# Altium PCB WaferPCB.PcbDoc (part 1 of 2)
Units mm, origin at the board's own origin, x right, y up, seen from the top; angles counter-clockwise.
Board outline 440 x 440 mm, 2 copper layers (Top Layer, Bottom Layer); 4 components, 400 nets, 800 pads, 0 vias.
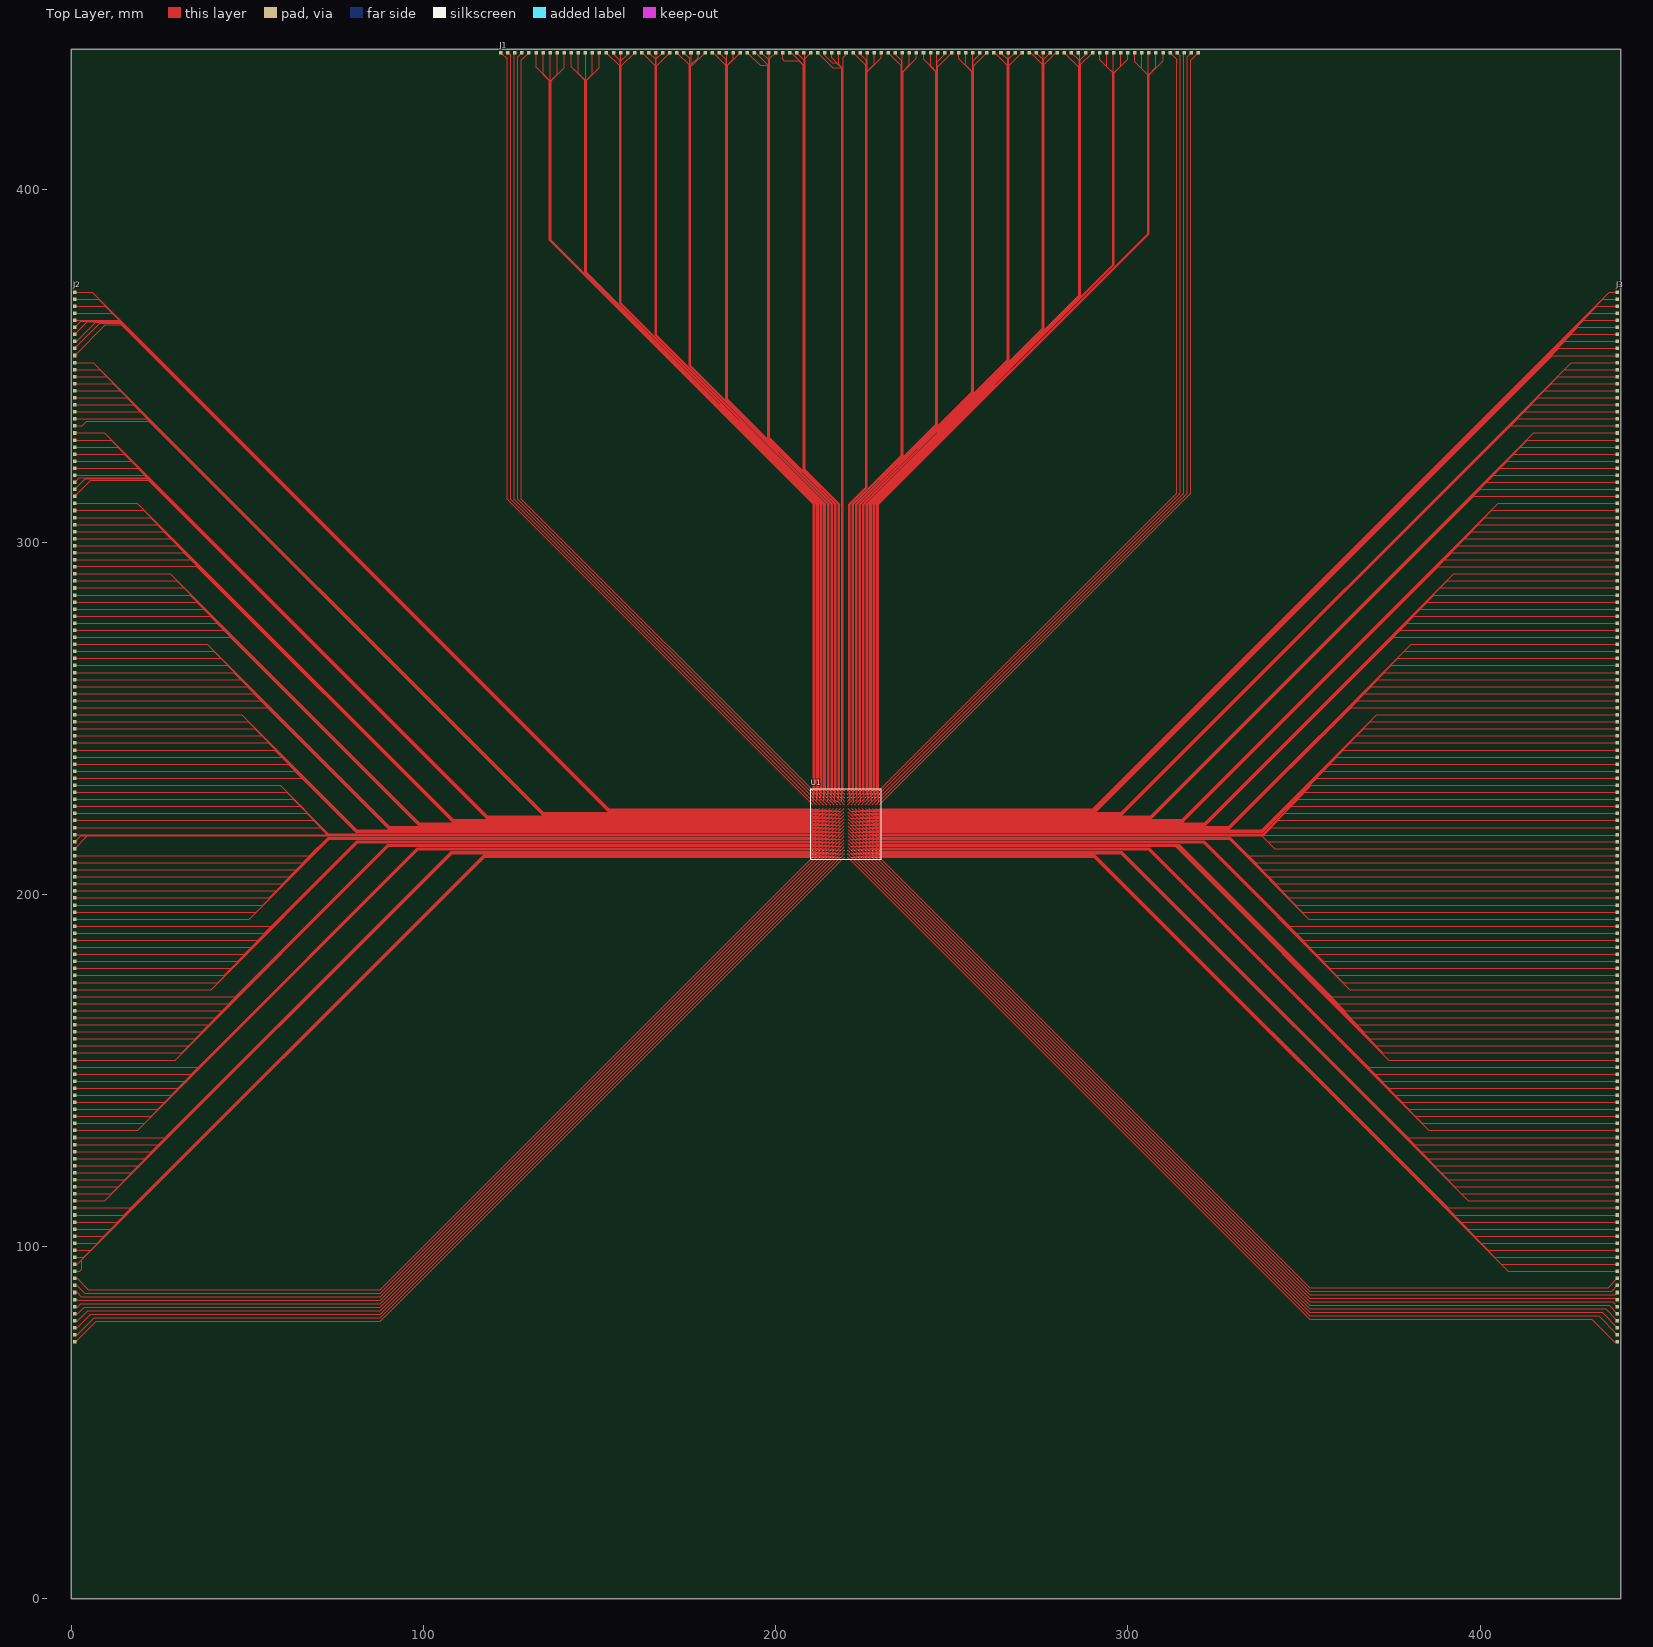
[diagram p0: Top Layer view]
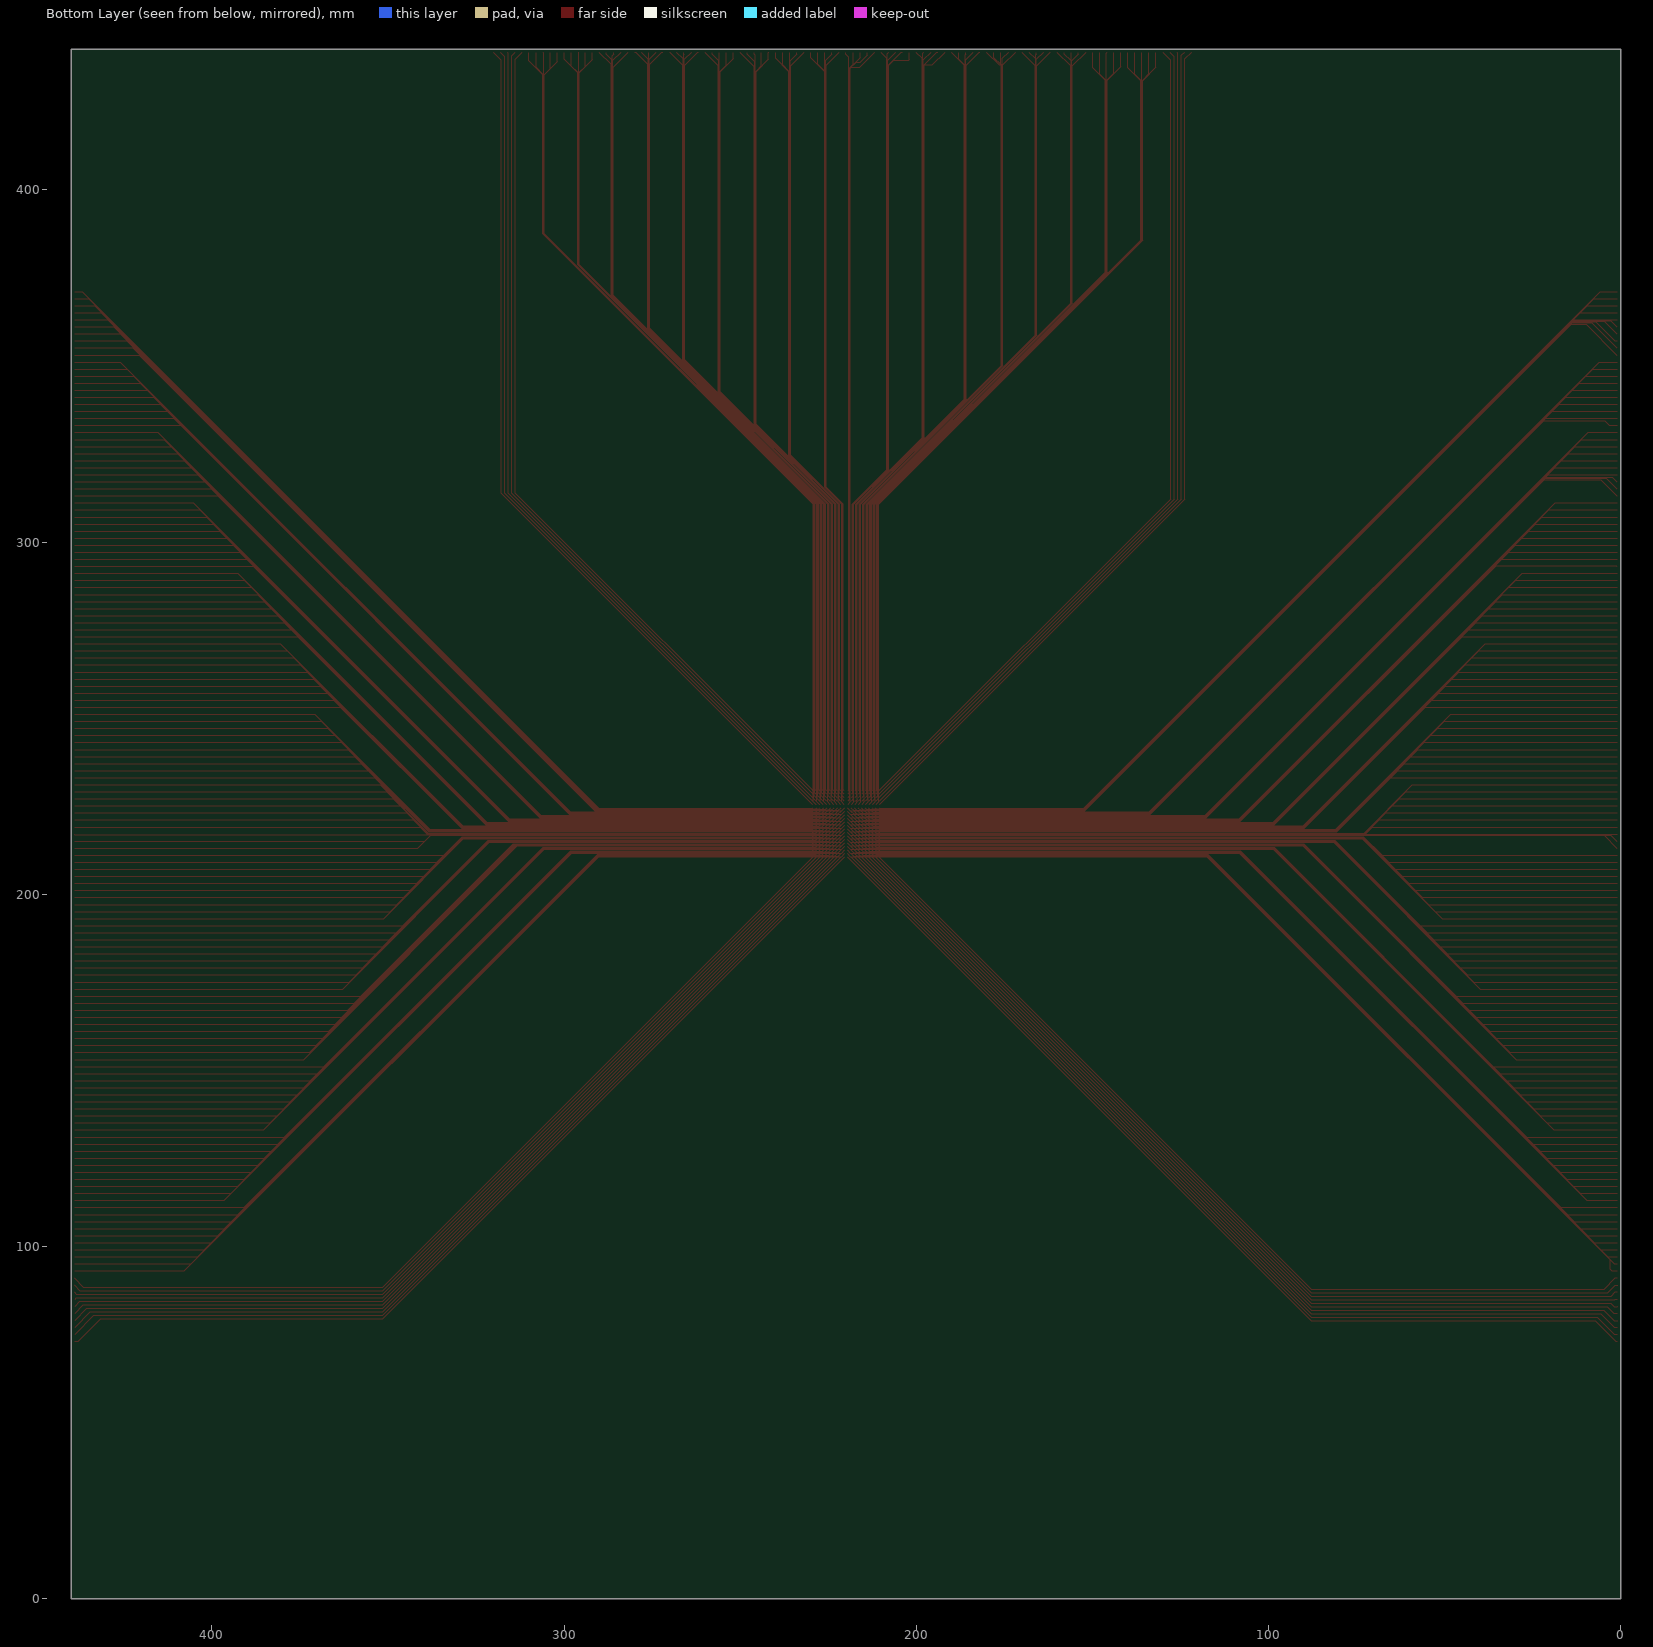
[diagram p1: Bottom Layer view, seen from below]

## Layer stack, top to bottom
Top Solder: solder mask 0.0102, Solder Resist, Dk 3.5
Top Layer: signal copper 0.0356
Dielectric 1: dielectric 0.32, FR-4, Dk 4.8
Bottom Layer: signal copper 0.0356
Bottom Solder: solder mask 0.0102, Solder Resist, Dk 3.5

## Board outline
0,0 440,0 440,440 0,440

## Design rules (kind name [scope] priority, off if disabled: settings)
Clearance [All] p1: gap=0.254 ignorepadtopadclearanceinfootprint=FALSE except(0: Arc-Hole Track-Hole SMDPad-Hole THPad-Hole Via-Hole Fill-Hole Poly-Hole Region-Hole Text-Hole; 0.04: Arc-Arc Arc-Track Arc-SMDPad Arc-THPad Arc-Via Track-Track Track-SMDPad Track-THPad Track-Via SMDPad-SMDPad SMDPad-THPad SMDPad-Via THPad-THPad THPad-Via Via-Via)
ComponentClearance [All] p1: gap=0.05 collisioncheckmode=3 verticalgap=0.254 showdistances=FALSE
DiffPairsRouting [All] p1: maxlimit=0.2 minlimit=0.04 mostfreqgap=0.04 toplayer_minwidth=0.2 toplayer_maxwidth=0.2 toplayer_prefwidth=0.2 bottomlayer_minwidth=0.2 bottomlayer_maxwidth=0.2 bottomlayer_prefwidth=0.2 maxuncoupledlength=12.7
PolygonConnect [All] p1: connectstyle=Relief reliefconductorwidth=0.254 reliefentries=4 polygonreliefangle="90 Angle" airgapwidth=0.254
RoutingLayers [All] p1: top layer_v5=TRUE bottom layer_v5=FALSE
RoutingVias [All] p1: holewidth=0.711 width=1.27 viastyle="Through Hole" minholewidth=0.711 minwidth=1.27 maxholewidth=0.711 maxwidth=1.27
SolderMaskExpansion [All] p1: expansion=0.102 istentingtop=FALSE
Width [All] p1: maxlimit=0.03 minlimit=0.03 preferedwidth=0.03 minimp=50.000000 maximp=50.000000 favimp=50.000000
27 further rules are at their usual default settings.

## Classes and differential pairs
component class "Wafer Schematic": J1 J2 J3

## Components (designator, comment, footprint, x,y, rotation, side; value= is the part's Value field where it differs from the comment)
J1 "Bond Pads (100)" "BOND PADS (100)" 320,442.5 r90 top
J2 "Bond Pads (150)" "BOND PADS (150)" 2,70 r0 top
J3 "Bond Pads (150)" "BOND PADS (150)" 440,70 r0 top
U1 "Sensing Electrodes (400)" LGA400C100P20X20_2000X2000X0 220,220 r0 top

## Footprints (in the part's own frame and the unit in brackets; to place one, negate y for a bottom-side part, rotate by r counter-clockwise, add the part's x,y. Pads: shape width x height; smd on the part's side, far side on the other; paste and mask are expansions set on the pad)
"BOND PADS (100)" [mm]
  rect 1x1 smd: 1(-3.5,0) 2(-3.5,2) 3(-3.5,4) 4(-3.5,6) 5(-3.5,8) 6(-3.5,10) 7(-3.5,12) 8(-3.5,14) 9(-3.5,16) 10(-3.5,18) 11(-3.5,20) 12(-3.5,22) 13(-3.5,24) 14(-3.5,26) 15(-3.5,28) 16(-3.5,30) 17(-3.5,32) 18(-3.5,34) 19(-3.5,36) 20(-3.5,38) 21(-3.5,40) 22(-3.5,42) 23(-3.5,44) 24(-3.5,46) 25(-3.5,48) 26(-3.5,50) 27(-3.5,52) 28(-3.5,54) 29(-3.5,56) 30(-3.5,58) 31(-3.5,60) 32(-3.5,62) 33(-3.5,64) 34(-3.5,66) 35(-3.5,68) 36(-3.5,70) 37(-3.5,72) 38(-3.5,74) 39(-3.5,76) 40(-3.5,78) 41(-3.5,80) 42(-3.5,82) 43(-3.5,84) 44(-3.5,86) 45(-3.5,88) 46(-3.5,90) 47(-3.5,92) 48(-3.5,94) 49(-3.5,96) 50(-3.5,98) 51(-3.5,100) 52(-3.5,102) 53(-3.5,104) 54(-3.5,106) 55(-3.5,108) 56(-3.5,110) 57(-3.5,112) 58(-3.5,114) 59(-3.5,116) 60(-3.5,118) 61(-3.5,120) 62(-3.5,122) 63(-3.5,124) 64(-3.5,126) 65(-3.5,128) 66(-3.5,130) 67(-3.5,132) 68(-3.5,134) 69(-3.5,136) 70(-3.5,138) 71(-3.5,140) 72(-3.5,142) 73(-3.5,144) 74(-3.5,146) 75(-3.5,148) 76(-3.5,150) 77(-3.5,152) 78(-3.5,154) 79(-3.5,156) 80(-3.5,158) 81(-3.5,160) 82(-3.5,162) 83(-3.5,164) 84(-3.5,166) 85(-3.5,168) 86(-3.5,170) 87(-3.5,172) 88(-3.5,174) 89(-3.5,176) 90(-3.5,178) 91(-3.5,180) 92(-3.5,182) 93(-3.5,184) 94(-3.5,186) 95(-3.5,188) 96(-3.5,190) 97(-3.5,192) 98(-3.5,194) 99(-3.5,196) 100(-3.5,198)
"BOND PADS (150)" [mm]
  rect 1x1 smd: 1(-1,3) 2(-1,5) 3(-1,7) 4(-1,9) 5(-1,11) 6(-1,13) 7(-1,15) 8(-1,17) 9(-1,19) 10(-1,21) 11(-1,23) 12(-1,25) 13(-1,27) 14(-1,29) 15(-1,31) 16(-1,33) 17(-1,35) 18(-1,37) 19(-1,39) 20(-1,41) 21(-1,43) 22(-1,45) 23(-1,47) 24(-1,49) 25(-1,51) 26(-1,53) 27(-1,55) 28(-1,57) 29(-1,59) 30(-1,61) 31(-1,63) 32(-1,65) 33(-1,67) 34(-1,69) 35(-1,71) 36(-1,73) 37(-1,75) 38(-1,77) 39(-1,79) 40(-1,81) 41(-1,83) 42(-1,85) 43(-1,87) 44(-1,89) 45(-1,91) 46(-1,93) 47(-1,95) 48(-1,97) 49(-1,99) 50(-1,101) 51(-1,103) 52(-1,105) 53(-1,107) 54(-1,109) 55(-1,111) 56(-1,113) 57(-1,115) 58(-1,117) 59(-1,119) 60(-1,121) 61(-1,123) 62(-1,125) 63(-1,127) 64(-1,129) 65(-1,131) 66(-1,133) 67(-1,135) 68(-1,137) 69(-1,139) 70(-1,141) 71(-1,143) 72(-1,145) 73(-1,147) 74(-1,149) 75(-1,151) 76(-1,153) 77(-1,155) 78(-1,157) 79(-1,159) 80(-1,161) 81(-1,163) 82(-1,165) 83(-1,167) 84(-1,169) 85(-1,171) 86(-1,173) 87(-1,175) 88(-1,177) 89(-1,179) 90(-1,181) 91(-1,183) 92(-1,185) 93(-1,187) 94(-1,189) 95(-1,191) 96(-1,193) 97(-1,195) 98(-1,197) 99(-1,199) 100(-1,201) 101(-1,203) 102(-1,205) 103(-1,207) 104(-1,209) 105(-1,211) 106(-1,213) 107(-1,215) 108(-1,217) 109(-1,219) 110(-1,221) 111(-1,223) 112(-1,225) 113(-1,227) 114(-1,229) 115(-1,231) 116(-1,233) 117(-1,235) 118(-1,237) 119(-1,239) 120(-1,241) 121(-1,243) 122(-1,245) 123(-1,247) 124(-1,249) 125(-1,251) 126(-1,253) 127(-1,255) 128(-1,257) 129(-1,259) 130(-1,261) 131(-1,263) 132(-1,265) 133(-1,267) 134(-1,269) 135(-1,271) 136(-1,273) 137(-1,275) 138(-1,277) 139(-1,279) 140(-1,281) 141(-1,283) 142(-1,285) 143(-1,287) 144(-1,289) 145(-1,291) 146(-1,293) 147(-1,295) 148(-1,297) 149(-1,299) 150(-1,301)
LGA400C100P20X20_2000X2000X0 [mm] "LGA, 400-Leads, Body 20.00x20.00mmx0.00mm, Pitch 1.00mm"
  round 0.1 smd: 1(-9.5,9.5) 2(-8.5,9.5) 3(-7.5,9.5) 4(-6.5,9.5) 5(-5.5,9.5) 6(-4.5,9.5) 7(-3.5,9.5) 8(-2.5,9.5) 9(-1.5,9.5) 10(-0.5,9.5) 11(0.5,9.5) 12(1.5,9.5) 13(2.5,9.5) 14(3.5,9.5) 15(4.5,9.5) 16(5.5,9.5) 17(6.5,9.5) 18(7.5,9.5) 19(8.5,9.5) 20(9.5,9.5) 21(-9.5,8.5) 22(-8.5,8.5) 23(-7.5,8.5) 24(-6.5,8.5) 25(-5.5,8.5) 26(-4.5,8.5) 27(-3.5,8.5) 28(-2.5,8.5) 29(-1.5,8.5) 30(-0.5,8.5) 31(0.5,8.5) 32(1.5,8.5) 33(2.5,8.5) 34(3.5,8.5) 35(4.5,8.5) 36(5.5,8.5) 37(6.5,8.5) 38(7.5,8.5) 39(8.5,8.5) 40(9.5,8.5) 41(-9.5,7.5) 42(-8.5,7.5) 43(-7.5,7.5) 44(-6.5,7.5) 45(-5.5,7.5) 46(-4.5,7.5) 47(-3.5,7.5) 48(-2.5,7.5) 49(-1.5,7.5) 50(-0.5,7.5) 51(0.5,7.5) 52(1.5,7.5) 53(2.5,7.5) 54(3.5,7.5) 55(4.5,7.5) 56(5.5,7.5) 57(6.5,7.5) 58(7.5,7.5) 59(8.5,7.5) 60(9.5,7.5) 61(-9.5,6.5) 62(-8.5,6.5) 63(-7.5,6.5) 64(-6.5,6.5) 65(-5.5,6.5) 66(-4.5,6.5) 67(-3.5,6.5) 68(-2.5,6.5) 69(-1.5,6.5) 70(-0.5,6.5) 71(0.5,6.5) 72(1.5,6.5) 73(2.5,6.5) 74(3.5,6.5) 75(4.5,6.5) 76(5.5,6.5) 77(6.5,6.5) 78(7.5,6.5) 79(8.5,6.5) 80(9.5,6.5) 81(-9.5,5.5) 82(-8.5,5.5) 83(-7.5,5.5) 84(-6.5,5.5) 85(-5.5,5.5) 86(-4.5,5.5) 87(-3.5,5.5) 88(-2.5,5.5) 89(-1.5,5.5) 90(-0.5,5.5) 91(0.5,5.5) 92(1.5,5.5) 93(2.5,5.5) 94(3.5,5.5) 95(4.5,5.5) 96(5.5,5.5) 97(6.5,5.5) 98(7.5,5.5) 99(8.5,5.5) 100(9.5,5.5) 101(-9.5,4.5) 102(-8.5,4.5) 103(-7.5,4.5) 104(-6.5,4.5) 105(-5.5,4.5) 106(-4.5,4.5) 107(-3.5,4.5) 108(-2.5,4.5) 109(-1.5,4.5) 110(-0.5,4.5) 111(0.5,4.5) 112(1.5,4.5) 113(2.5,4.5) 114(3.5,4.5) 115(4.5,4.5) 116(5.5,4.5) 117(6.5,4.5) 118(7.5,4.5) 119(8.5,4.5) 120(9.5,4.5) 121(-9.5,3.5) 122(-8.5,3.5) 123(-7.5,3.5) 124(-6.5,3.5) 125(-5.5,3.5) 126(-4.5,3.5) 127(-3.5,3.5) 128(-2.5,3.5) 129(-1.5,3.5) 130(-0.5,3.5) 131(0.5,3.5) 132(1.5,3.5) 133(2.5,3.5) 134(3.5,3.5) 135(4.5,3.5) 136(5.5,3.5) 137(6.5,3.5) 138(7.5,3.5) 139(8.5,3.5) 140(9.5,3.5) 141(-9.5,2.5) 142(-8.5,2.5) 143(-7.5,2.5) 144(-6.5,2.5) 145(-5.5,2.5) 146(-4.5,2.5) 147(-3.5,2.5) 148(-2.5,2.5) 149(-1.5,2.5) 150(-0.5,2.5) 151(0.5,2.5) 152(1.5,2.5) 153(2.5,2.5) 154(3.5,2.5) 155(4.5,2.5) 156(5.5,2.5) 157(6.5,2.5) 158(7.5,2.5) 159(8.5,2.5) 160(9.5,2.5) 161(-9.5,1.5) 162(-8.5,1.5) 163(-7.5,1.5) 164(-6.5,1.5) 165(-5.5,1.5) 166(-4.5,1.5) 167(-3.5,1.5) 168(-2.5,1.5) 169(-1.5,1.5) 170(-0.5,1.5) 171(0.5,1.5) 172(1.5,1.5) 173(2.5,1.5) 174(3.5,1.5) 175(4.5,1.5) 176(5.5,1.5) 177(6.5,1.5) 178(7.5,1.5) 179(8.5,1.5) 180(9.5,1.5) 181(-9.5,0.5) 182(-8.5,0.5) 183(-7.5,0.5) 184(-6.5,0.5) 185(-5.5,0.5) 186(-4.5,0.5) 187(-3.5,0.5) 188(-2.5,0.5) 189(-1.5,0.5) 190(-0.5,0.5) 191(0.5,0.5) 192(1.5,0.5) 193(2.5,0.5) 194(3.5,0.5) 195(4.5,0.5) 196(5.5,0.5) 197(6.5,0.5) 198(7.5,0.5) 199(8.5,0.5) 200(9.5,0.5) 201(-9.5,-0.5) 202(-8.5,-0.5) 203(-7.5,-0.5) 204(-6.5,-0.5) 205(-5.5,-0.5) 206(-4.5,-0.5) 207(-3.5,-0.5) 208(-2.5,-0.5) 209(-1.5,-0.5) 210(-0.5,-0.5) 211(0.5,-0.5) 212(1.5,-0.5) 213(2.5,-0.5) 214(3.5,-0.5) 215(4.5,-0.5) 216(5.5,-0.5) 217(6.5,-0.5) 218(7.5,-0.5) 219(8.5,-0.5) 220(9.5,-0.5) 221(-9.5,-1.5) 222(-8.5,-1.5) 223(-7.5,-1.5) 224(-6.5,-1.5) 225(-5.5,-1.5) 226(-4.5,-1.5) 227(-3.5,-1.5) 228(-2.5,-1.5) 229(-1.5,-1.5) 230(-0.5,-1.5) 231(0.5,-1.5) 232(1.5,-1.5) 233(2.5,-1.5) 234(3.5,-1.5) 235(4.5,-1.5) 236(5.5,-1.5) 237(6.5,-1.5) 238(7.5,-1.5) 239(8.5,-1.5) 240(9.5,-1.5) 241(-9.5,-2.5) 242(-8.5,-2.5) 243(-7.5,-2.5) 244(-6.5,-2.5) 245(-5.5,-2.5) 246(-4.5,-2.5) 247(-3.5,-2.5) 248(-2.5,-2.5) 249(-1.5,-2.5) 250(-0.5,-2.5) 251(0.5,-2.5) 252(1.5,-2.5) 253(2.5,-2.5) 254(3.5,-2.5) 255(4.5,-2.5) 256(5.5,-2.5) 257(6.5,-2.5) 258(7.5,-2.5) 259(8.5,-2.5) 260(9.5,-2.5) 261(-9.5,-3.5) 262(-8.5,-3.5) 263(-7.5,-3.5) 264(-6.5,-3.5) 265(-5.5,-3.5) 266(-4.5,-3.5) 267(-3.5,-3.5) 268(-2.5,-3.5) 269(-1.5,-3.5) 270(-0.5,-3.5) 271(0.5,-3.5) 272(1.5,-3.5) 273(2.5,-3.5) 274(3.5,-3.5) 275(4.5,-3.5) 276(5.5,-3.5) 277(6.5,-3.5) 278(7.5,-3.5) 279(8.5,-3.5) 280(9.5,-3.5) 281(-9.5,-4.5) 282(-8.5,-4.5) 283(-7.5,-4.5) 284(-6.5,-4.5) 285(-5.5,-4.5) 286(-4.5,-4.5) 287(-3.5,-4.5) 288(-2.5,-4.5) 289(-1.5,-4.5) 290(-0.5,-4.5) 291(0.5,-4.5) 292(1.5,-4.5) 293(2.5,-4.5) 294(3.5,-4.5) 295(4.5,-4.5) 296(5.5,-4.5) 297(6.5,-4.5) 298(7.5,-4.5) 299(8.5,-4.5) 300(9.5,-4.5) 301(-9.5,-5.5) 302(-8.5,-5.5) 303(-7.5,-5.5) 304(-6.5,-5.5) 305(-5.5,-5.5) 306(-4.5,-5.5) 307(-3.5,-5.5) 308(-2.5,-5.5) 309(-1.5,-5.5) 310(-0.5,-5.5) 311(0.5,-5.5) 312(1.5,-5.5) 313(2.5,-5.5) 314(3.5,-5.5) 315(4.5,-5.5) 316(5.5,-5.5) 317(6.5,-5.5) 318(7.5,-5.5) 319(8.5,-5.5) 320(9.5,-5.5) 321(-9.5,-6.5) 322(-8.5,-6.5) 323(-7.5,-6.5) 324(-6.5,-6.5) 325(-5.5,-6.5) 326(-4.5,-6.5) 327(-3.5,-6.5) 328(-2.5,-6.5) 329(-1.5,-6.5) 330(-0.5,-6.5) 331(0.5,-6.5) 332(1.5,-6.5) 333(2.5,-6.5) 334(3.5,-6.5) 335(4.5,-6.5) 336(5.5,-6.5) 337(6.5,-6.5) 338(7.5,-6.5) 339(8.5,-6.5) 340(9.5,-6.5) 341(-9.5,-7.5) 342(-8.5,-7.5) 343(-7.5,-7.5) 344(-6.5,-7.5) 345(-5.5,-7.5) 346(-4.5,-7.5) 347(-3.5,-7.5) 348(-2.5,-7.5) 349(-1.5,-7.5) 350(-0.5,-7.5) 351(0.5,-7.5) 352(1.5,-7.5) 353(2.5,-7.5) 354(3.5,-7.5) 355(4.5,-7.5) 356(5.5,-7.5) 357(6.5,-7.5) 358(7.5,-7.5) 359(8.5,-7.5) 360(9.5,-7.5) 361(-9.5,-8.5) 362(-8.5,-8.5) 363(-7.5,-8.5) 364(-6.5,-8.5) 365(-5.5,-8.5) 366(-4.5,-8.5) 367(-3.5,-8.5) 368(-2.5,-8.5) 369(-1.5,-8.5) 370(-0.5,-8.5) 371(0.5,-8.5) 372(1.5,-8.5) 373(2.5,-8.5) 374(3.5,-8.5) 375(4.5,-8.5) 376(5.5,-8.5) 377(6.5,-8.5) 378(7.5,-8.5) 379(8.5,-8.5) 380(9.5,-8.5) 381(-9.5,-9.5) 382(-8.5,-9.5) 383(-7.5,-9.5) 384(-6.5,-9.5) 385(-5.5,-9.5) 386(-4.5,-9.5) 387(-3.5,-9.5) 388(-2.5,-9.5) 389(-1.5,-9.5) 390(-0.5,-9.5) 391(0.5,-9.5) 392(1.5,-9.5) 393(2.5,-9.5) 394(3.5,-9.5) 395(4.5,-9.5) 396(5.5,-9.5) 397(6.5,-9.5) 398(7.5,-9.5) 399(8.5,-9.5) 400(9.5,-9.5)
  silkscreen extent -10,-10 10,10

## Part data
J1: "100 pads for the shorter side of the chip", Part Number="Bond Pads (100)"
J2 J3: "150 pads for the longer side of the chip", Part Number="Bond Pads (150)"
U1: library part "Silicon Die Holder 400 Electrodes", "400 Electrodes covering a 2 mm by 2 mm sensing 10x", Part Number="Silicon Die Holder 400 Electrodes"

## Nets (pads, with @x,y where several pads share a name; then routed paths per layer and width w, separated by ;. In a path a pad name is that pad's centre, name@x,y a point inside that pad or via, vN(x,y) a via of type N, cw(c..) or ccw(c..) an arc to the next point about the centre after c; other vN are vias at no path point)
NetJ1_1: J1.1 U1.100 | length 251
  Top Layer w0.03: U1.100@229.5,225.5 317.85,313.85 317.85,436.85 J1.1@320,439
NetJ1_2: J1.2 U1.80 | length 249.2
  Top Layer w0.03: U1.80@229.5,226.5 316.85,313.85 316.85,437.85 J1.2@318,439
NetJ1_3: J1.3 U1.60 | length 247.3
  Top Layer w0.03: U1.60@229.5,227.5 315.85,313.85 315.85,438.85 J1.3@316,439
NetJ1_4: J1.5 U1.20 | length 245.2
  Top Layer w0.03: U1.20@229.5,229.5 229.5,229.565 313.85,313.915 313.85,437.15 J1.5@312,439
NetJ1_5: J1.4 U1.40 | length 246.2
  Top Layer w0.03: U1.40@229.5,228.5 229.5,228.565 314.85,313.915 314.85,438.15 J1.4@314,439
NetJ1_6: J1.38 U1.53 | length 221.2
  Top Layer w0.03: U1.53@222.5,227.5 223,228 223,310.775 245.775,333.55 245.775,438.26 246,438.485 J1.38@246,439
NetJ1_7: J1.52 U1.30 | length 211.1
  Top Layer w0.03: J1.52@218,439 218,435.7 219.125,434.575 219.125,228.875 U1.30@219.5,228.5
NetJ1_8: J1.40 U1.13 | length 220.5
  Top Layer w0.03: U1.13@222.5,229.5 222.75,229.75 222.75,310.775 245.525,333.55 245.525,433.575 242.015,437.085 242.015,438.985 J1.40@242,439
NetJ1_9: J1.9 U1.39 | length 243.2
  Top Layer w0.03: U1.39@228.5,228.5 228.875,228.875 228.875,310.775 305.725,387.625 305.725,432.75 304,434.475 J1.9@304,439
NetJ1_10: J1.35 U1.14 | length 224.4
  Top Layer w0.03: U1.14@223.5,229.5 223.75,229.75 223.75,310.775 255.75,342.775 255.75,433.575 252.015,437.31 252.015,438.985 J1.35@252,439
NetJ1_11: J1.39 U1.33 | length 220.8
  Top Layer w0.03: U1.33@222.5,228.5 222.875,228.875 222.875,310.775 245.65,333.55 245.65,433.575 244,435.225 J1.39@244,439
NetJ1_12: J1.43 U1.52 | length 217.5
  Top Layer w0.03: U1.52@221.5,227.5 222,228 222,310.775 235.975,324.75 235.975,433.575 236,433.6 J1.43@236,439
NetJ1_13: J1.8 U1.59 | length 243.6
  Top Layer w0.03: U1.59@228.5,227.5 229,228 229,310.775 305.85,387.625 305.85,438.85 J1.8@306,439
NetJ1_14: J1.42 U1.72 | length 219.3
  Top Layer w0.03: U1.72@221.5,226.5 222.125,227.125 222.125,310.775 236.1,324.75 236.1,433.575 238,435.475 J1.42@238,439
NetJ1_15: J1.41 U1.92 | length 221.2
  Top Layer w0.03: U1.92@221.5,225.5 222.25,226.25 222.25,310.775 236.225,324.75 236.225,433.575 239.985,437.335 239.985,438.985 J1.41@240,439
NetJ1_16: J1.37 U1.73 | length 223.1
  Top Layer w0.03: U1.73@222.5,226.5 223.125,227.125 223.125,310.775 245.9,333.55 245.9,436.385 248,438.485 J1.37@248,439
NetJ1_17: J1.13 U1.58 | length 239.9
  Top Layer w0.03: U1.58@227.5,227.5 228,228 228,310.775 295.925,378.7 295.925,438.925 J1.13@296,439
NetJ1_18: J1.7 U1.79 | length 245.4
  Top Layer w0.03: U1.79@228.5,226.5 229.125,227.125 229.125,310.775 305.975,387.625 305.975,432.75 308,434.775 J1.7@308,439
NetJ1_19: J1.16 U1.97 | length 239.8
  Top Layer w0.03: U1.97@226.5,225.5 227.25,226.25 227.25,310.775 286.626,370.151 286.626,435.626 J1.16@290,439
NetJ1_20: J1.45 U1.12 | length 216.9
  Top Layer w0.03: U1.12@221.5,229.5 221.75,229.75 221.75,310.775 235.725,324.75 235.725,435.275 J1.45@232,439
NetJ1_21: J1.46 U1.91 | length 217.4
  Top Layer w0.03: U1.91@220.5,225.5 221.25,226.25 221.25,310.775 226.075,315.6 226.075,433.575 229.985,437.485 229.985,438.985 J1.46@230,439
NetJ1_22: J1.49 U1.31 | length 213.4
  Top Layer w0.03: U1.31@220.5,228.5 220.875,228.875 220.875,310.775 225.7,315.6 225.7,436.785 224,438.485 J1.49@224,439
NetJ1_23: J1.55 U1.90 | length 218
  Top Layer w0.03: J1.55@212,439 212,438.975 216.3,434.675 218.65,434.675 218.75,434.575 218.75,226.25 U1.90@219.5,225.5
NetJ1_24: J1.48 U1.51 | length 213.8
  Top Layer w0.03: U1.51@220.5,227.5 221,228 221,310.775 225.825,315.6 225.825,433.575 226,433.75 J1.48@226,439
NetJ1_25: J1.29 U1.35 | length 228.5
  Top Layer w0.03: U1.35@224.5,228.5 224.875,228.875 224.875,310.775 265.925,351.825 265.925,437.075 J1.29@264,439
NetJ1_26: J1.10 U1.19 | length 242.9
  Top Layer w0.03: U1.19@228.5,229.5 228.75,229.75 228.75,310.775 305.6,387.625 305.6,432.75 302,436.35 J1.10@302,439
NetJ1_27: J1.30 U1.15 | length 228.3
  Top Layer w0.03: U1.15@224.5,229.5 224.75,229.75 224.75,310.775 265.8,351.825 265.8,435.45 262.265,438.985 262.015,438.985 J1.30@262,439
NetJ1_28: J1.12 U1.78 | length 241.7
  Top Layer w0.03: U1.78@227.5,226.5 228.125,227.125 228.125,310.775 296.05,378.7 296.05,433.225 298,435.175 J1.12@298,439
NetJ1_29: J1.11 U1.98 | length 243.5
  Top Layer w0.03: U1.98@227.5,225.5 228.25,226.25 228.25,310.775 296.175,378.7 296.175,433.225 300,437.05 J1.11@300,439
NetJ1_30: J1.89 U1.63 | length 240.9
  Top Layer w0.03: J1.89@144,439 144,433.125 146,431.125 146,376.65 211.875,310.775 211.875,227.125 U1.63@212.5,226.5
NetJ1_31: J1.44 U1.32 | length 217.2
  Top Layer w0.03: U1.32@221.5,228.5 221.875,228.875 221.875,310.775 235.85,324.75 235.85,436.635 234,438.485 J1.44@234,439
NetJ1_32: J1.28 U1.55 | length 228.7
  Top Layer w0.03: U1.55@224.5,227.5 225,228 225,310.775 266.05,351.825 266.05,438.435 266,438.485 J1.28@266,439
NetJ1_33: J1.33 U1.54 | length 225
  Top Layer w0.03: U1.54@223.5,227.5 224,228 224,310.775 256,342.775 256,438.485 J1.33@256,439
NetJ1_34: J1.36 U1.93 | length 224.9
  Top Layer w0.03: U1.93@222.5,225.5 223.25,226.25 223.25,310.775 246.025,333.55 246.025,435.025 J1.36@250,439
NetJ1_35: J1.26 U1.95 | length 232.4
  Top Layer w0.03: U1.95@224.5,225.5 225.25,226.25 225.25,310.775 266.3,351.825 266.3,435.45 269.835,438.985 269.985,438.985 J1.26@270,439
NetJ1_36: J1.27 U1.75 | length 230.5
  Top Layer w0.03: U1.75@224.5,226.5 225.125,227.125 225.125,310.775 266.175,351.825 266.175,437.175 J1.27@268,439
NetJ1_37: J1.25 U1.16 | length 232.1
  Top Layer w0.03: U1.16@225.5,229.5 225.75,229.75 225.75,310.775 275.75,360.775 275.75,435.625 272.39,438.985 272.015,438.985 J1.25@272,439
NetJ1_38: J1.47 U1.71 | length 215.6
  Top Layer w0.03: U1.71@220.5,226.5 221.125,227.125 221.125,310.775 225.95,315.6 225.95,433.575 228,435.625 J1.47@228,439
NetJ1_39: J1.24 U1.36 | length 232.1
  Top Layer w0.03: U1.36@225.5,228.5 225.875,228.875 225.875,310.775 275.875,360.775 275.875,437.125 J1.24@274,439
NetJ1_40: J1.88 U1.43 | length 239
  Top Layer w0.03: J1.88@146,439 146.125,438.875 146.125,376.65 212,310.775 212,228 U1.43@212.5,227.5
NetJ1_41: J1.23 U1.56 | length 232.4
  Top Layer w0.03: U1.56@225.5,227.5 226,228 226,310.775 276,360.775 276,438.485 J1.23@276,439
NetJ1_42: J1.21 U1.96 | length 236.3
  Top Layer w0.03: U1.96@225.5,225.5 226.25,226.25 226.25,310.775 276.25,360.775 276.25,435.625 279.61,438.985 279.985,438.985 J1.21@280,439
NetJ1_43: J1.19 U1.37 | length 236.2
  Top Layer w0.03: U1.37@226.5,228.5 226.875,228.875 226.875,310.775 286.251,370.151 286.251,436.749 J1.19@284,439
NetJ1_44: J1.17 U1.77 | length 238
  Top Layer w0.03: U1.77@226.5,226.5 227.125,227.125 227.125,310.775 286.501,370.151 286.501,436.986 288,438.485 J1.17@288,439
NetJ1_45: J1.6 U1.99 | length 247.3
  Top Layer w0.03: U1.99@228.5,225.5 229.25,226.25 229.25,310.775 306.1,387.625 306.1,432.75 310,436.65 J1.6@310,439
NetJ1_46: J1.85 U1.84 | length 239
  Top Layer w0.03: J1.85@152,439 155.75,435.25 155.75,367.775 212.75,310.775 212.75,226.25 U1.84@213.5,225.5
NetJ1_47: J1.95 U1.82 | length 246.4
  Top Layer w0.03: J1.95@132,439 132,434.825 135.825,431 135.825,385.7 210.75,310.775 210.75,226.25 U1.82@211.5,225.5
NetJ1_48: J1.75 U1.86 | length 231.5
  Top Layer w0.03: J1.75@172,439 175.45,435.55 175.45,350.075 214.75,310.775 214.75,226.25 U1.86@215.5,225.5
NetJ1_49: J1.15 U1.18 | length 239.3
  Top Layer w0.03: U1.18@227.5,229.5 227.75,229.75 227.75,310.775 295.675,378.7 295.675,433.225 292,436.9 J1.15@292,439
NetJ1_50: J1.18 U1.57 | length 236.5
  Top Layer w0.03: U1.57@226.5,227.5 227,228 227,310.775 286.376,370.151 286.376,438.109 286,438.485 J1.18@286,439
NetJ1_51: J1.14 U1.38 | length 239.5
  Top Layer w0.03: U1.38@227.5,228.5 227.875,228.875 227.875,310.775 295.8,378.7 295.8,433.225 294,435.025 J1.14@294,439
NetJ1_52: J1.91 U1.2 | length 242.2
  Top Layer w0.03: J1.91@140,439 140,434.675 136.325,431 136.325,385.7 211.25,310.775 211.25,229.75 U1.2@211.5,229.5
NetJ1_53: J1.51 U1.10 | length 209.9
  Top Layer w0.03: U1.10@219.5,229.5 219.25,229.75 219.25,437.735 220,438.485 J1.51@220,439
NetJ1_54: J1.69 U1.67 | length 226
  Top Layer w0.03: J1.69@184,439 186,437 186,340.65 215.875,310.775 215.875,227.125 U1.67@216.5,226.5
NetJ1_55: J1.53 U1.50 | length 212.9
  Top Layer w0.03: J1.53@216,439 216.015,438.985 216.015,437.56 219,434.575 219,228 U1.50@219.5,227.5
NetJ1_56: J1.82 U1.24 | length 235
  Top Layer w0.03: J1.82@158,439 158,438.485 156.125,436.61 156.125,367.775 213.125,310.775 213.125,228.875 U1.24@213.5,228.5
NetJ1_57: J1.34 U1.34 | length 224.7
  Top Layer w0.03: U1.34@223.5,228.5 223.875,228.875 223.875,310.775 255.875,342.775 255.875,433.575 254,435.45 J1.34@254,439
NetJ1_58: J1.72 U1.26 | length 227.8
  Top Layer w0.03: J1.72@178,439 177.985,438.985 177.985,437.56 175.825,435.4 175.825,350.075 215.125,310.775 215.125,228.875 U1.26@215.5,228.5
NetJ1_59: J1.80 U1.85 | length 235.3
  Top Layer w0.03: J1.80@162,439 162.015,438.985 162.165,438.985 165.825,435.325 165.825,358.7 213.75,310.775 213.75,226.25 U1.85@214.5,225.5
NetJ1_60: J1.83 U1.44 | length 235.3
  Top Layer w0.03: J1.83@156,439 156,438.485 156,367.775 213,310.775 213,228 U1.44@213.5,227.5
NetJ1_61: J1.84 U1.64 | length 237.1
  Top Layer w0.03: J1.84@154,439 154,438.485 155.875,436.61 155.875,367.775 212.875,310.775 212.875,227.125 U1.64@213.5,226.5
NetJ1_62: J1.87 U1.23 | length 238.7
  Top Layer w0.03: J1.87@148,439 148,432.875 146.25,431.125 146.25,376.65 212.125,310.775 212.125,228.875 U1.23@212.5,228.5
NetJ1_63: J1.86 U1.3 | length 238.4
  Top Layer w0.03: J1.86@150,439 150,434.75 146.375,431.125 146.375,376.65 212.25,310.775 212.25,229.75 U1.3@212.5,229.5
NetJ1_64: J1.68 U1.47 | length 224.1
  Top Layer w0.03: J1.68@186,439 186,438.485 186.125,438.36 186.125,340.65 216,310.775 216,228 U1.47@216.5,227.5
NetJ1_65: J1.77 U1.25 | length 231.3
  Top Layer w0.03: J1.77@168,439 166.2,437.2 166.2,358.7 214.125,310.775 214.125,228.875 U1.25@214.5,228.5
NetJ1_66: J1.71 U1.6 | length 227.8
  Top Layer w0.03: J1.71@180,439 176.4,435.4 175.975,435.4 175.975,350.075 215.275,310.775 215.275,229.725 U1.6@215.5,229.5
NetJ1_67: J1.79 U1.65 | length 233.4
  Top Layer w0.03: J1.79@164,439 165.95,437.05 165.95,358.7 213.875,310.775 213.875,227.125 U1.65@214.5,226.5
NetJ1_68: J1.81 U1.4 | length 234.8
  Top Layer w0.03: J1.81@160,439 156.25,435.25 156.25,367.775 213.25,310.775 213.25,229.75 U1.4@213.5,229.5
NetJ1_69: J1.92 U1.22 | length 242.4
  Top Layer w0.03: J1.92@138,439 138,432.8 136.2,431 136.2,385.7 211.125,310.775 211.125,228.875 U1.22@211.5,228.5
NetJ1_70: J1.93 U1.42 | length 242.8
  Top Layer w0.03: J1.93@136,439 136.075,438.925 136.075,385.7 211,310.775 211,228 U1.42@211.5,227.5
NetJ1_71: J1.70 U1.87 | length 228
  Top Layer w0.03: J1.70@182,439 182.015,438.985 182.29,438.985 185.875,435.4 185.875,340.65 215.75,310.775 215.75,226.25 U1.87@216.5,225.5
NetJ1_72: J1.78 U1.45 | length 231.6
  Top Layer w0.03: J1.78@166,439 166,438.485 166.075,438.41 166.075,358.7 214,310.775 214,228 U1.45@214.5,227.5
NetJ1_73: J1.94 U1.62 | length 244.6
  Top Layer w0.03: J1.94@134,439 134,432.95 135.95,431 135.95,385.7 210.875,310.775 210.875,227.125 U1.62@211.5,226.5
NetJ1_74: J1.74 U1.66 | length 229.7
  Top Layer w0.03: J1.74@174,439 175.575,437.425 175.575,350.075 214.875,310.775 214.875,227.125 U1.66@215.5,226.5
NetJ1_75: J1.32 U1.74 | length 226.8
  Top Layer w0.03: U1.74@223.5,226.5 224.125,227.125 224.125,310.775 256.125,342.775 256.125,436.61 258,438.485 J1.32@258,439
NetJ1_76: J1.66 U1.7 | length 223.5
  Top Layer w0.03: J1.66@190,439 186.4,435.4 186.375,435.4 186.375,340.65 216.25,310.775 216.25,229.75 U1.7@216.5,229.5
NetJ1_77: J1.22 U1.76 | length 234.2
  Top Layer w0.03: U1.76@225.5,226.5 226.125,227.125 226.125,310.775 276.125,360.775 276.125,437.125 J1.22@278,439
NetJ1_78: J1.67 U1.27 | length 223.8
  Top Layer w0.03: J1.67@188,439 187.985,438.985 187.985,437.135 186.25,435.4 186.25,340.65 216.125,310.775 216.125,228.875 U1.27@216.5,228.5
NetJ1_79: J1.50 U1.11 | length 213.1
  Top Layer w0.03: U1.11@220.5,229.5 220.75,229.75 220.75,310.775 225.575,315.6 225.575,435.425 J1.50@222,439
NetJ1_80: J1.65 U1.88 | length 225.4
  Top Layer w0.03: J1.65@192,439 195.6,435.4 197.825,435.4 197.825,329.7 216.75,310.775 216.75,226.25 U1.88@217.5,225.5
NetJ1_81: J1.76 U1.5 | length 231
  Top Layer w0.03: J1.76@170,439 169.985,438.985 166.325,435.325 166.325,358.7 214.25,310.775 214.25,229.75 U1.5@214.5,229.5
NetJ1_82: J1.64 U1.68 | length 222.6
  Top Layer w0.03: J1.64@194,439 194.015,438.985 194.365,438.985 197.95,435.4 197.95,329.7 216.875,310.775 216.875,226.875 217.25,226.5 U1.68@217.5,226.5
NetJ1_83: J1.63 U1.48 | length 220.4
  Top Layer w0.03: J1.63@196,439 198.075,436.925 198.075,329.7 217,310.775 217,228 U1.48@217.5,227.5
NetJ1_84: J1.61 U1.8 | length 218.1
  Top Layer w0.03: J1.61@200,439 198.325,437.325 198.325,329.7 217.25,310.775 217.25,229.75 U1.8@217.5,229.5
NetJ1_85: J1.58 U1.49 | length 216.7
  Top Layer w0.03: J1.58@206,439 208.175,436.825 208.175,320.6 218,310.775 218,228 U1.49@218.5,227.5
NetJ1_86: J1.62 U1.28 | length 218.6
  Top Layer w0.03: J1.62@198,439 198.2,438.8 198.2,329.7 217.125,310.775 217.125,228.875 U1.28@217.5,228.5
NetJ1_87: J1.90 U1.83 | length 242.7
  Top Layer w0.03: J1.90@142,439 142,435 145.875,431.125 145.875,376.65 211.75,310.775 211.75,226.25 U1.83@212.5,225.5
NetJ1_88: J1.59 U1.69 | length 218.8
  Top Layer w0.03: J1.59@204,439 204.45,439 208.05,435.4 208.05,320.6 217.875,310.775 217.875,227.125 U1.69@218.5,226.5
NetJ1_89: J1.56 U1.9 | length 214.3
  Top Layer w0.03: J1.56@210,439 208.425,437.425 208.425,320.6 218.25,310.775 218.25,229.75 U1.9@218.5,229.5
NetJ1_90: J1.57 U1.29 | length 214.8
  Top Layer w0.03: J1.57@208,439 208.3,438.7 208.3,320.6 218.125,310.775 218.125,228.875 U1.29@218.5,228.5
NetJ1_91: J1.20 U1.17 | length 235.9
  Top Layer w0.03: U1.17@226.5,229.5 226.75,229.75 226.75,310.775 286.126,370.151 286.126,434.874 J1.20@282,439
NetJ1_92: J1.60 U1.89 | length 222.8
  Top Layer w0.03: J1.60@202,439 202,437.075 202.375,436.7 206.625,436.7 207.925,435.4 207.925,320.6 217.75,310.775 217.75,226.25 U1.89@218.5,225.5
NetJ1_93: J1.54 U1.70 | length 215.5
  Top Layer w0.03: J1.54@214,439 214,438.275 216.1,436.175 217.275,436.175 218.875,434.575 218.875,227.125 U1.70@219.5,226.5
NetJ1_94: J1.73 U1.46 | length 228.1
  Top Layer w0.03: J1.73@176,439 176,435.7 175.7,435.4 175.7,350.075 215,310.775 215,228 U1.46@215.5,227.5
NetJ1_95: J1.31 U1.94 | length 228.6
  Top Layer w0.03: U1.94@223.5,225.5 224.25,226.25 224.25,310.775 256.25,342.775 256.25,435.25 J1.31@260,439
NetJ1_96: J1.96 U1.1 | length 244.6
  Top Layer w0.03: J1.96@130,439 127.825,436.825 127.825,312.24 210.5,229.565 U1.1@210.5,229.5
NetJ1_97: J1.97 U1.21 | length 245.6
  Top Layer w0.03: J1.97@128,439 126.825,437.825 126.825,312.24 210.5,228.565 U1.21@210.5,228.5
NetJ1_98: J1.98 U1.41 | length 246.6
  Top Layer w0.03: J1.98@126,439 125.825,438.825 125.825,312.24 210.5,227.565 U1.41@210.5,227.5
NetJ1_99: J1.100 U1.81 | length 250.2
  Top Layer w0.03: J1.100@122,439 123.825,437.175 123.825,312.175 U1.81@210.5,225.5
NetJ1_100: J1.99 U1.61 | length 248.3
  Top Layer w0.03: J1.99@124,439 124.825,438.175 124.825,312.175 U1.61@210.5,226.5
NetJ2_1: J2.137 U1.124 | length 263.2
  Top Layer w0.03: J2.137@1,345 12.007,345 133.932,223.075 213.075,223.075 U1.124@213.5,223.5
NetJ2_2: J2.136 U1.125 | length 263.4
  Top Layer w0.03: J2.136@1,343 13.901,343 133.901,223 214,223 U1.125@214.5,223.5
NetJ2_3: J2.139 U1.122 | length 262.7
  Top Layer w0.03: J2.139@1,349 8.219,349 133.994,223.225 211.225,223.225 U1.122@211.5,223.5
NetJ2_4: J2.1 U1.390 | length 275.5
  Top Layer w0.03: J2.1@1,73 1.325,73 7.175,78.85 87.85,78.85 U1.390@219.5,210.5
NetJ2_5: J2.131 U1.130 | length 265.6
  Top Layer w0.03: J2.131@1,333 3.225,333 4.498,334.273 22.098,334.273 133.745,222.625 218.625,222.625 U1.130@219.5,223.5
NetJ2_6: J2.2 U1.389 | length 273.6
  Top Layer w0.03: J2.2@1,75 1.75,75 6.6,79.85 87.85,79.85 U1.389@218.5,210.5
NetJ2_7: J2.3 U1.388 | length 271.8
  Top Layer w0.03: J2.3@1,77 1.05,76.95 1.75,76.95 5.65,80.85 87.85,80.85 U1.388@217.5,210.5
NetJ2_8: J2.4 U1.387 | length 270.1
  Top Layer w0.03: J2.4@1,79 1.1,78.9 1.775,78.9 4.725,81.85 87.85,81.85 U1.387@216.5,210.5
NetJ2_9: J2.134 U1.127 | length 263.9
  Top Layer w0.03: J2.134@1,339 1.009,339.009 17.68,339.009 133.839,222.85 215.85,222.85 U1.127@216.5,223.5
NetJ2_10: J2.5 U1.386 | length 268.2
  Top Layer w0.03: J2.5@1,81 1.075,80.925 1.85,80.925 3.775,82.85 87.85,82.85 U1.386@215.5,210.5
NetJ2_11: J2.6 U1.385 | length 266.4
  Top Layer w0.03: J2.6@1,83 1.125,82.875 1.775,82.875 2.75,83.85 87.85,83.85 U1.385@214.5,210.5
NetJ2_12: J2.7 U1.384 | length 264.6
  Top Layer w0.03: J2.7@1,85 1.75,85 1.9,84.85 87.85,84.85 U1.384@213.5,210.5
NetJ2_13: J2.8 U1.383 | length 263.6
  Top Layer w0.03: J2.8@1,87 1.025,87.025 1.7,87.025 2.875,85.85 87.85,85.85 U1.383@212.5,210.5
NetJ2_14: J2.9 U1.382 | length 262.6
  Top Layer w0.03: J2.9@1,89 1.075,88.925 1.75,88.925 3.825,86.85 87.85,86.85 U1.382@211.5,210.5
NetJ2_15: J2.135 U1.126 | length 263.6
  Top Layer w0.03: J2.135@1,341 15.795,341 133.87,222.925 214.925,222.925 U1.126@215.5,223.5
NetJ2_16: J2.10 U1.381 | length 261.6
  Top Layer w0.03: J2.10@1,91 1.025,91.025 1.7,91.025 4.875,87.85 87.85,87.85 U1.381@210.5,210.5
NetJ2_17: J2.71 U1.250 | length 220.4
  Top Layer w0.03: J2.71@1,213 4.625,216.625 218.625,216.625 U1.250@219.5,217.5
NetJ2_18: J2.72 U1.249 | length 218.5
  Top Layer w0.03: J2.72@1,215 2.7,216.7 217.7,216.7 U1.249@218.5,217.5
NetJ2_19: J2.70 U1.261 | length 211.8
  Top Layer w0.03: J2.70@1,211 67.695,211 72.995,216.3 210.3,216.3 U1.261@210.5,216.5
NetJ2_20: J2.68 U1.263 | length 215.4
  Top Layer w0.03: J2.68@1,207 63.907,207 73.058,216.15 212.15,216.15 U1.263@212.5,216.5
NetJ2_21: J2.69 U1.262 | length 213.6
  Top Layer w0.03: J2.69@1,209 65.801,209 73.026,216.225 211.225,216.225 U1.262@211.5,216.5
NetJ2_22: J2.67 U1.264 | length 217.3
  Top Layer w0.03: J2.67@1,205 62.014,205 73.089,216.075 213.075,216.075 U1.264@213.5,216.5
NetJ2_23: J2.65 U1.266 | length 220.9
  Top Layer w0.03: J2.65@1,201 58.226,201 73.151,215.925 214.925,215.925 U1.266@215.5,216.5
NetJ2_24: J2.66 U1.265 | length 219.1
  Top Layer w0.03: J2.66@1,203 60.12,203 73.12,216 214,216 U1.265@214.5,216.5
NetJ2_25: J2.61 U1.270 | length 228.2
  Top Layer w0.03: J2.61@1,193 50.65,193 73.275,215.625 218.625,215.625 U1.270@219.5,216.5
NetJ2_26: J2.64 U1.267 | length 222.7
  Top Layer w0.03: J2.64@1,199 56.332,199 73.182,215.85 215.85,215.85 U1.267@216.5,216.5
NetJ2_27: J2.63 U1.268 | length 224.6
  Top Layer w0.03: J2.63@1,197 54.438,197 73.213,215.775 216.775,215.775 U1.268@217.5,216.5
NetJ2_28: J2.132 U1.129 | length 264.3
  Top Layer w0.03: J2.132@1,335 21.476,335 133.776,222.7 217.7,222.7 U1.129@218.5,223.5
NetJ2_29: J2.62 U1.269 | length 226.4
  Top Layer w0.03: J2.62@1,195 52.544,195 73.244,215.7 217.7,215.7 U1.269@218.5,216.5
NetJ2_30: J2.60 U1.281 | length 219.6
  Top Layer w0.03: J2.60@1,191 56.795,191 81.095,215.3 210.3,215.3 U1.281@210.5,215.5
NetJ2_31: J2.59 U1.282 | length 221.5
  Top Layer w0.03: J2.59@1,189 54.901,189 81.126,215.225 211.225,215.225 U1.282@211.5,215.5
NetJ2_32: J2.57 U1.284 | length 225.1
  Top Layer w0.03: J2.57@1,185 51.114,185 81.189,215.075 213.075,215.075 U1.284@213.5,215.5
NetJ2_33: J2.54 U1.287 | length 230.6
  Top Layer w0.03: J2.54@1,179 45.432,179 81.282,214.85 215.85,214.85 U1.287@216.5,215.5
NetJ2_34: J2.58 U1.283 | length 223.3
  Top Layer w0.03: J2.58@1,187 53.007,187 81.158,215.15 212.15,215.15 U1.283@212.5,215.5
NetJ2_35: J2.55 U1.286 | length 228.8
  Top Layer w0.03: J2.55@1,181 47.326,181 81.251,214.925 214.925,214.925 U1.286@215.5,215.5
NetJ2_36: J2.52 U1.289 | length 234.3
  Top Layer w0.03: J2.52@1,175 41.644,175 81.344,214.7 217.7,214.7 U1.289@218.5,215.5
NetJ2_37: J2.53 U1.288 | length 232.4
  Top Layer w0.03: J2.53@1,177 43.538,177 81.313,214.775 216.775,214.775 U1.288@217.5,215.5
NetJ2_38: J2.50 U1.301 | length 227.5
  Top Layer w0.03: J2.50@1,171 46.645,171 89.945,214.3 210.3,214.3 U1.301@210.5,214.5
NetJ2_39: J2.47 U1.304 | length 233
  Top Layer w0.03: J2.47@1,165 40.964,165 90.039,214.075 213.075,214.075 U1.304@213.5,214.5
NetJ2_40: J2.51 U1.290 | length 236.1
  Top Layer w0.03: J2.51@1,173 39.75,173 81.375,214.625 218.625,214.625 U1.290@219.5,215.5
NetJ2_41: J2.49 U1.302 | length 229.3
  Top Layer w0.03: J2.49@1,169 44.751,169 89.976,214.225 211.225,214.225 U1.302@211.5,214.5
NetJ2_42: J2.48 U1.303 | length 231.2
  Top Layer w0.03: J2.48@1,167 42.857,167 90.007,214.15 212.15,214.15 U1.303@212.5,214.5
NetJ2_43: J2.46 U1.305 | length 234.8
  Top Layer w0.03: J2.46@1,163 39.07,163 90.07,214 214,214 U1.305@214.5,214.5
NetJ2_44: J2.42 U1.309 | length 242.1
  Top Layer w0.03: J2.42@1,155 31.494,155 90.194,213.7 217.7,213.7 U1.309@218.5,214.5
NetJ2_45: J2.45 U1.306 | length 236.7
  Top Layer w0.03: J2.45@1,161 37.176,161 90.101,213.925 214.925,213.925 U1.306@215.5,214.5
NetJ2_46: J2.44 U1.307 | length 238.5
  Top Layer w0.03: J2.44@1,159 35.282,159 90.132,213.85 215.85,213.85 U1.307@216.5,214.5
NetJ2_47: J2.43 U1.308 | length 240.3
  Top Layer w0.03: J2.43@1,157 33.388,157 90.163,213.775 216.775,213.775 U1.308@217.5,214.5
NetJ2_48: J2.40 U1.321 | length 235.4
  Top Layer w0.03: J2.40@1,151 36.045,151 98.345,213.3 210.3,213.3 U1.321@210.5,213.5
NetJ2_49: J2.41 U1.310 | length 244
  Top Layer w0.03: J2.41@1,153 29.6,153 90.225,213.625 218.625,213.625 U1.310@219.5,214.5
NetJ2_50: J2.38 U1.323 | length 239
  Top Layer w0.03: J2.38@1,147 32.257,147 98.407,213.15 212.15,213.15 U1.323@212.5,213.5
NetJ2_51: J2.39 U1.322 | length 237.2
  Top Layer w0.03: J2.39@1,149 34.151,149 98.376,213.225 211.225,213.225 U1.322@211.5,213.5
NetJ2_52: J2.32 U1.329 | length 250
  Top Layer w0.03: J2.32@1,135 20.894,135 98.594,212.7 217.7,212.7 U1.329@218.5,213.5
NetJ2_53: J2.37 U1.324 | length 240.9
  Top Layer w0.03: J2.37@1,145 30.364,145 98.439,213.075 213.075,213.075 U1.324@213.5,213.5
NetJ2_54: J2.35 U1.326 | length 244.5
  Top Layer w0.03: J2.35@1,141 26.576,141 98.501,212.925 214.925,212.925 U1.326@215.5,213.5
NetJ2_55: J2.33 U1.328 | length 248.2
  Top Layer w0.03: J2.33@1,137 22.788,137 98.563,212.775 216.775,212.775 U1.328@217.5,213.5
NetJ2_56: J2.34 U1.327 | length 246.4
  Top Layer w0.03: J2.34@1,139 24.682,139 98.532,212.85 215.85,212.85 U1.327@216.5,213.5
NetJ2_57: J2.30 U1.341 | length 243.3
  Top Layer w0.03: J2.30@1,131 26.62,131 107.92,212.3 210.3,212.3 U1.341@210.5,212.5
NetJ2_58: J2.29 U1.342 | length 245.1
  Top Layer w0.03: J2.29@1,129 24.726,129 107.951,212.225 211.225,212.225 U1.342@211.5,212.5
NetJ2_59: J2.31 U1.330 | length 251.8
  Top Layer w0.03: J2.31@1,133 19,133 98.625,212.625 218.625,212.625 U1.330@219.5,213.5
NetJ2_60: J2.28 U1.343 | length 246.9
  Top Layer w0.03: J2.28@1,127 22.833,127 107.983,212.15 212.15,212.15 U1.343@212.5,212.5
NetJ2_61: J2.27 U1.344 | length 248.7
  Top Layer w0.03: J2.27@1,125 20.939,125 108.014,212.075 213.075,212.075 U1.344@213.5,212.5
NetJ2_62: J2.26 U1.345 | length 250.6
  Top Layer w0.03: J2.26@1,123 19.045,123 108.045,212 214,212 U1.345@214.5,212.5
NetJ2_63: J2.76 U1.245 | length 216.2
  Top Layer w0.03: J2.76@1,223 66.901,223 72.901,217 214,217 U1.245@214.5,217.5